# Altium PCB Voltage_2020.PcbDoc
Units mm, origin at the board's own origin, x right, y up, seen from the top; angles counter-clockwise.
Board outline 212.5 x 132.84 mm, 2 copper layers (Top Layer, Bottom Layer); 93 components, 69 nets, 360 pads, 5 vias.
Unrouted connection lines stored in the file: 1.
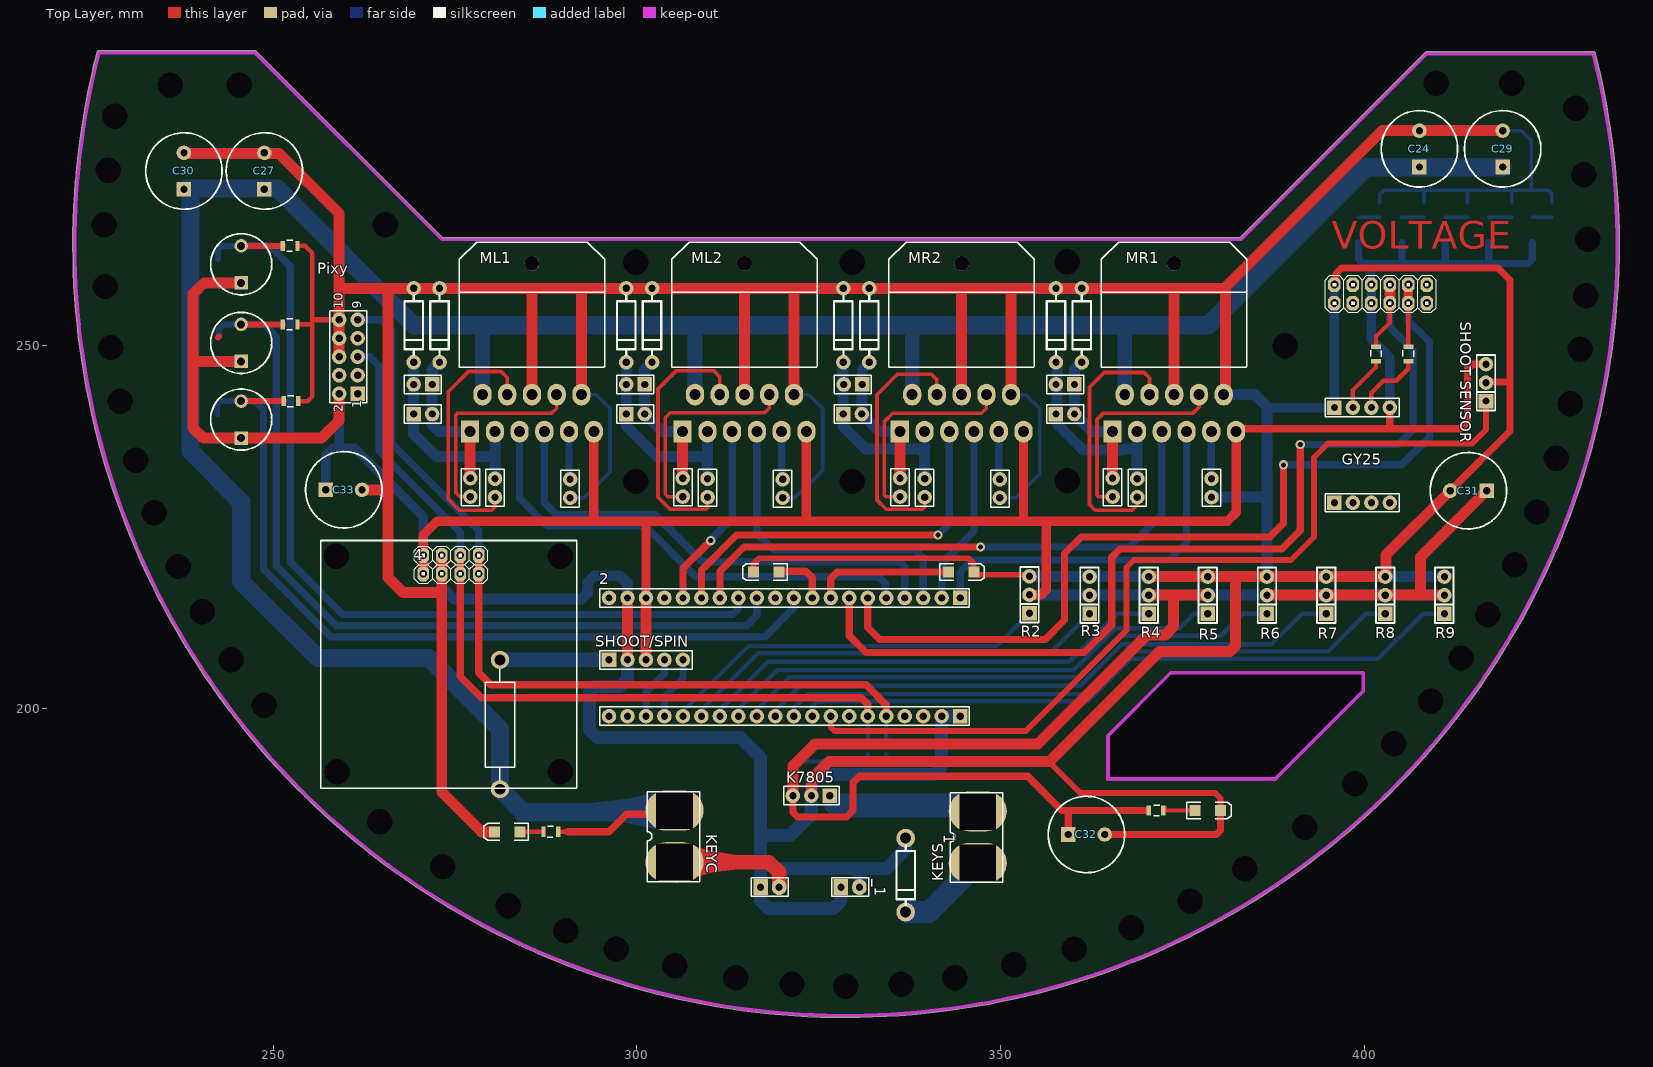
[diagram p0: Top Layer view]
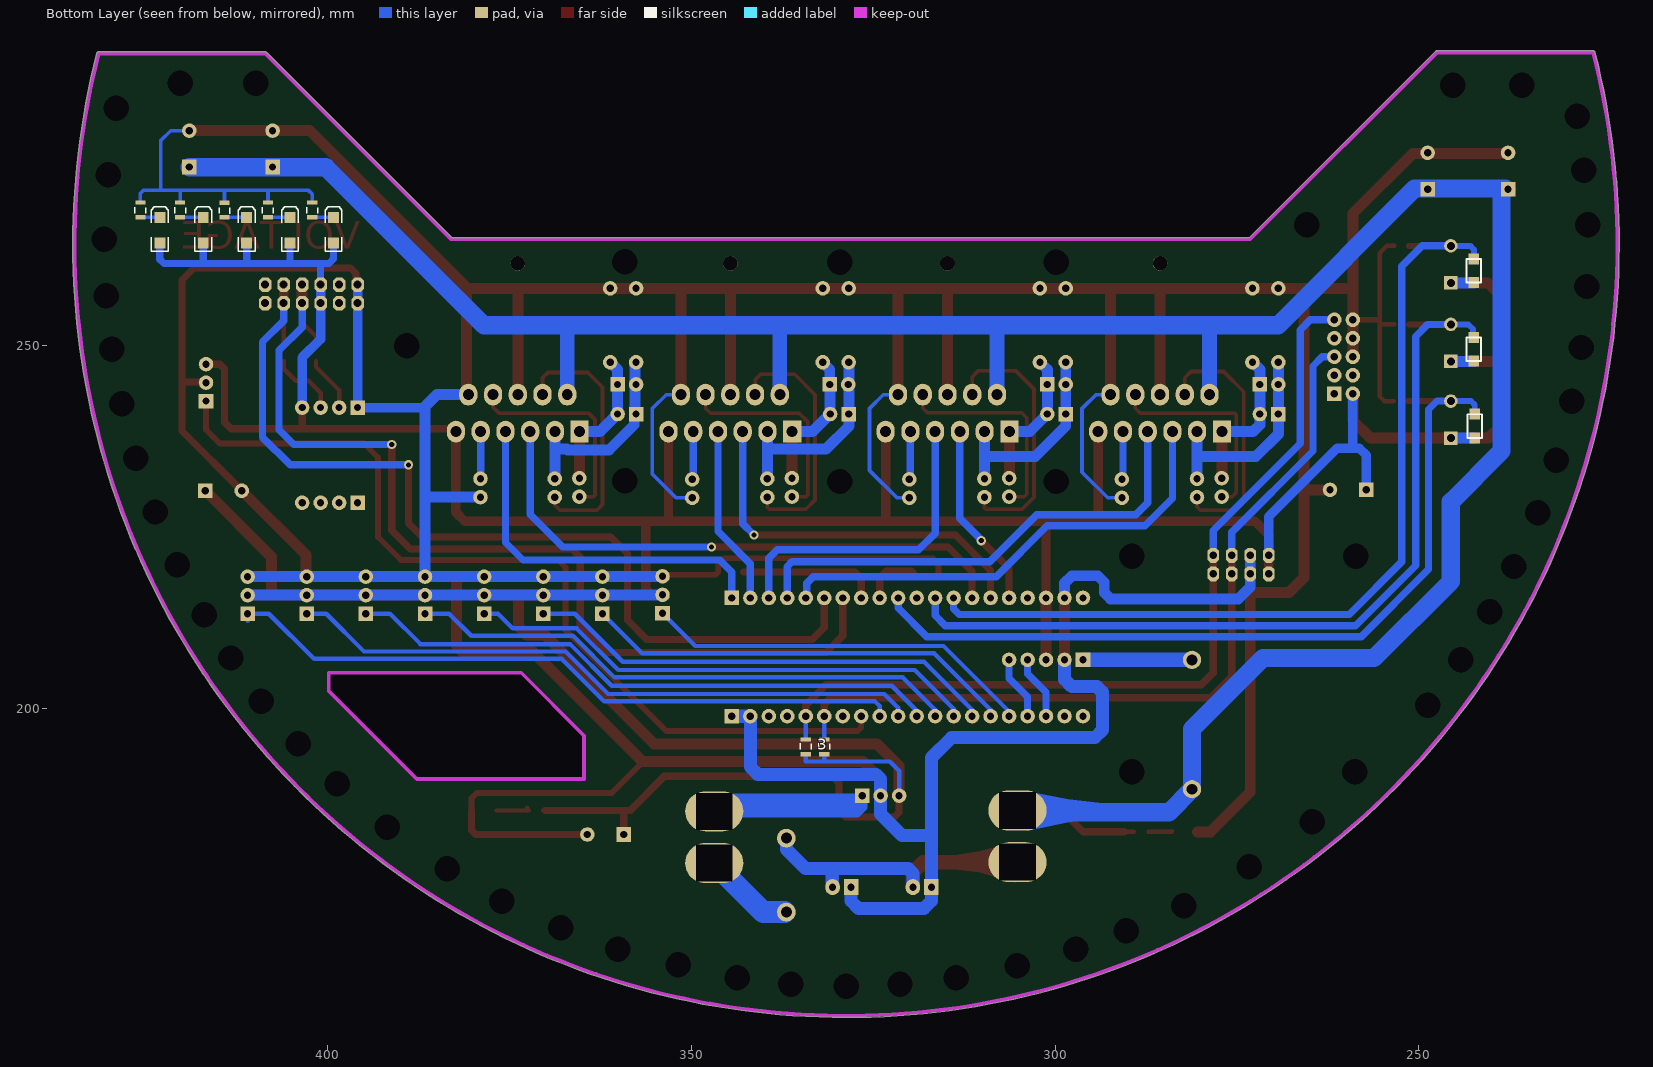
[diagram p1: Bottom Layer view, seen from below]

## Layer stack, top to bottom
Top Solder: solder mask 0.0102, Solder Resist, Dk 3.5
Top Layer: signal copper 0.0356
Dielectric1: dielectric 0.32, FR-4, Dk 4.8
Bottom Layer: signal copper 0.0356
Bottom Solder: solder mask 0.0102, Solder Resist, Dk 3.5

## Board outline
225.811,290.246 cw(c226.054,290.183) 225.835,290.305 cw(c226.06,290.195) 226.06,290.445 247.523,290.445 cw(c247.523,290.195) 247.7,290.372 cw(c247.523,290.195) 247.7,290.372 273.281,264.791 327.914,264.791 382.928,264.791 408.382,290.245 ccw(c408.559,290.068) 408.382,290.245 cw(c408.559,290.068) 408.559,290.318 431.389,290.318 cw(c431.44,290.073) 431.682,290.135 cw(c328.733,263.858) 434.983,263.858 cw(c328.733,263.858)
cut-out: 373.38,204.978 399.796,204.978 399.796,202.438 387.731,190.373 364.744,190.373 364.744,196.342

## Design rules (kind name [scope] priority, off if disabled: settings)
Clearance [All] p1: gap=0.254 ignorepadtopadclearanceinfootprint=FALSE except(0: Arc-Hole Track-Hole SMDPad-Hole THPad-Hole Via-Hole Fill-Hole Poly-Hole Region-Hole Text-Hole)
PolygonConnect [All] p1: connectstyle=Relief reliefconductorwidth=0.254 reliefentries=4 polygonreliefangle="90 Angle" airgapwidth=0.254
RoutingVias [All] p1: holewidth=0.711 width=1.27 viastyle="Through Hole" minholewidth=0.711 minwidth=1.27 maxholewidth=0.711 maxwidth=1.27
SolderMaskExpansion [All] p1: expansion=0.102
Width [All] p1: maxlimit=3 minlimit=0.254 preferedwidth=1
30 further rules are at their usual default settings.

## Components (designator, comment, footprint, x,y, rotation, side; value= is the part's Value field where it differs from the comment)
1 "" DIODE0.4#1 336.931,182.245 r270 top
2 "Comment" HDR1X20 344.424,215.265 r180 top
3 "Comment" MY_RES_SMD_0805 334.264,194.802 r270 bottom
4 "Comment" My_1X04 274.447,218.567 r180 top
_1 "Header 2" HDR1X2#1 328.041,175.514 r0 top
C24 "SHARP1" RB5-10.5 407.543,276.987 r270 top
C27 "SHARP1" RB5-10.5 248.793,273.939 r270 top
C29 "SHARP1" RB5-10.5 418.973,276.987 r270 top
C30 "SHARP1" RB5-10.5 237.744,273.939 r270 top
C31 "SHARP1" RB5-10.5 414.274,229.997 r0 top
C32 "SHARP1" RB5-10.5 361.783,182.753 r180 top
C33 "SHARP1" RB5-10.5 259.715,230.124 r180 top
GY25 "Comment" HDR1X4 395.859,241.427 r0 top
K7805 "Comment" HDR1X3 326.517,188.087 r180 top
KEYC "" "kk - duplicate1" 302.681,178.955 r90 top
KEYS "Component_1" "kk - duplicate1" 344.337,178.828 r90 top
ML1 "MOTOR4" "L6203 SL" 285.574,249.682 r180 top
ML2 "MOTOR4" "L6203 SL" 314.784,249.682 r180 top
MR1 "MOTOR4" "L6203 SL" 373.839,249.682 r180 top
MR2 "MOTOR4" "L6203 SL" 344.629,249.682 r180 top
Pixy "Comment" MY_HDR2X5 260.35,248.412 r90 top
R2 "" SIP3#1 353.949,213.147 r90 top
R3 "" SIP3#1 362.204,213.106 r90 top
R4 "" SIP3#1 370.332,213.106 r90 top
R5 "" SIP3#2 378.46,213.106 r90 top
R6 "" SIP3#1 386.588,213.106 r90 top
R7 "" SIP3#1 394.716,213.106 r90 top
R8 "" SIP3#1 402.844,213.106 r90 top
R9 "" SIP3#1 410.972,213.106 r90 top
"SHOOT SENSOR" "" SIP3#1 416.687,242.316 r90 top
SHOOT/SPIN "Comment" HDR1X5 296.164,206.756 r0 top
? "Comment" MY_RES_SMD_0805 425.704,268.605 r90 bottom
? "Comment" 3.2X1.6X1.1 423.037,265.811 r90 bottom
? "Comment" MY_RES_SMD_0805 420.243,268.605 r90 bottom
? "Comment" 3.2X1.6X1.1 417.068,265.811 r90 bottom
? "Comment" MY_RES_SMD_0805 414.147,268.561 r90 bottom
? "Comment" 3.2X1.6X1.1 411.099,265.811 r90 bottom
? "Comment" MY_RES_SMD_0805 408.178,268.605 r90 bottom
? "Comment" MY_RES_SMD_0805 402.082,268.605 r90 bottom
? "Comment" 3.2X1.6X1.1 405.13,265.811 r90 bottom
? "Comment" 3.2X1.6X1.1 399.161,265.811 r90 bottom
? "Comment" AXIAL-0.7 281.178,197.866 r90 top
? "Comment" MY_RES_SMD_0805 406.019,248.793 r270 top
? "Comment" MY_RES_SMD_0805 401.574,248.793 r270 top
? "Comment" HDR1X4 395.859,228.346 r0 top
? "Comment" MY_SPST_2 245.618,239.776 r90 top
? "Comment" MY_SPST_2 245.618,250.317 r90 top
? "Comment" MY_cap_smd10uf 242.443,260.223 r270 bottom
? "Comment" MY_cap_smd10uf 242.443,249.428 r270 bottom
? "Comment" MY_cap_smd10uf 242.316,238.887 r270 bottom
? "Comment" MY_RES_SMD_0805 252.476,242.316 r0 top
? "Comment" MY_RES_SMD_0805 252.349,252.857 r0 top
? "Comment" MY_RES_SMD_0805 252.349,263.652 r0 top
? "Comment" MY_SPST_2 245.618,261.112 r90 top
? "Comment" MY_RES_SMD_0805 331.724,194.802 r270 bottom
? "Comment" 3.2X1.6X1.1 344.551,218.821 r0 top
? "Comment" 3.2X1.6X1.1 317.754,218.821 r180 top
? "Comment" My_1X04 274.447,221.107 r180 top
? "Comment" My_2X06 402.209,257.048 r0 top
? "Comment" MY_RES_SMD_0805 288.163,183.122 r0 top
? "Comment" MY_RES_SMD_0805 371.348,186.055 r180 top
? "Comment" 3.2X1.6X1.1 282.174,183.122 r180 top
? "Comment" 3.2X1.6X1.1 378.46,186.055 r0 top
? "Comment" HDR1X20 344.424,199.009 r180 top
? "Cap" RAD-0.1 320.024,230.29 r270 top
? "Cap" RAD-0.1 309.704,230.378 r270 top
? "Cap" RAD-0.1 306.316,230.452 r270 top
? "Header 2" HDR1X2#2 298.528,240.538 r0 top
? "Header 2" HDR1X2#2 301.068,244.602 r180 top
? "" DIODE0.4#2 298.528,257.81 r270 top
? "" DIODE0.4#3 302.084,257.81 r270 top
? "Cap" RAD-0.1 290.814,230.29 r270 top
? "Cap" RAD-0.1 280.494,230.378 r270 top
? "Cap" RAD-0.1 277.106,230.452 r270 top
? "Header 2" HDR1X2#2 269.318,240.538 r0 top
? "Header 2" HDR1X2#2 271.858,244.602 r180 top
? "" DIODE0.4#2 269.318,257.81 r270 top
? "" DIODE0.4#3 272.874,257.81 r270 top
? "" DIODE0.4#3 331.929,257.81 r270 top
? "" DIODE0.4#2 328.373,257.81 r270 top
? "Header 2" HDR1X2#2 330.962,244.602 r180 top
? "Header 2" HDR1X2#2 328.373,240.538 r0 top
? "Cap" RAD-0.1 336.161,230.452 r270 top
? "Cap" RAD-0.1 339.549,230.378 r270 top
? "Cap" RAD-0.1 349.869,230.29 r270 top
? "" DIODE0.4#3 361.139,257.81 r270 top
? "" DIODE0.4#2 357.583,257.81 r270 top
? "Header 2" HDR1X2#2 360.123,244.602 r180 top
? "Header 2" HDR1X2#2 357.583,240.538 r0 top
? "Cap" RAD-0.1 365.371,230.452 r270 top
? "Cap" RAD-0.1 368.759,230.378 r270 top
? "Cap" RAD-0.1 378.968,230.378 r270 top
? "Header 2" HDR1X2#3 316.992,175.514 r0 top

## Footprints (in the part's own frame and the unit in brackets; to place one, negate y for a bottom-side part, rotate by r counter-clockwise, add the part's x,y. Pads: shape width x height; smd on the part's side, far side on the other; paste and mask are expansions set on the pad)
3.2X1.6X1.1 [mm] "SMT LED; 2 Flat Leads"
  rect 1.5x1.5 smd: 1(-1.75,0) 2(1.75,0)
  silkscreen extent -2.9,-1.15 3.2,1.15
AXIAL-0.7 [mm] "Axial Device, Thru-Hole; 2 Leads; 0.7 in Pin Spacing"
  round 2.5 hole 1.5: 1(-8.89,0) 2(8.89,0)
  silkscreen extent -7.62,-2.03 7.62,2.03
DIODE0.4#1 [mm]
  round 2.575 hole 1.5: 17(0,0) 18(10.16,0)
  silkscreen extent 1.02,-1.27 9.14,1.27
DIODE0.4#2 [mm]
  round 2 hole 1: 151(0,0) 152(10.16,0)
  silkscreen extent 1.02,-1.27 9.14,1.27
DIODE0.4#3 [mm]
  round 2 hole 1: 153(0,0) 154(10.16,0)
  silkscreen extent 1.02,-1.27 9.14,1.27
HDR1X2#1 [mm]
  rect 2x2.2 hole 1: 63(0,0)
  oval 2x2.2 hole 1: 64(2.54,0)
  silkscreen extent -1.27,-1.27 3.81,1.27
HDR1X2#2 [mm]
  rect 2x2 hole 1: 1(0,0)
  round 2 hole 1: 2(2.54,0)
  silkscreen extent -1.27,-1.27 3.81,1.27
HDR1X2#3 [mm]
  rect 2x2.2 hole 1: 1(0,0)
  oval 2x2.2 hole 1: 2(2.54,0)
  silkscreen extent -1.27,-1.27 3.81,1.27
HDR1X3 [mm] "Connector; Header; 3 Position"
  rect 2x2 hole 1: 1(0,0)
  round 2 hole 1: 2(2.54,0) 3(5.08,0)
  silkscreen extent -1.27,-1.27 6.35,1.27
HDR1X4 [mm] "Connector; Header; 4 Position"
  rect 2x2 hole 1 unplated: 1(0,0)
  round 2 hole 1 unplated: 2(2.54,0) 3(5.08,0) 4(7.62,0)
  silkscreen extent -1.27,-1.27 8.89,1.27
HDR1X5 [mm] "Connector; Header; 5 Position"
  rect 2x2 hole 1: 1(0,0)
  round 2 hole 1: 2(2.54,0) 3(5.08,0) 4(7.62,0) 5(10.16,0)
  silkscreen extent -1.27,-1.27 11.43,1.27
HDR1X20 [mm] "Connector; Header; 20 Position"
  rect 2x2 hole 1: 1(0,0)
  round 2 hole 1: 2(2.54,0) 3(5.08,0) 4(7.62,0) 5(10.16,0) 6(12.7,0) 7(15.24,0) 8(17.78,0) 9(20.32,0) 10(22.86,0) 11(25.4,0) 12(27.94,0) 13(30.48,0) 14(33.02,0) 15(35.56,0) 16(38.1,0) 17(40.64,0) 18(43.18,0) 19(45.72,0) 20(48.26,0)
  silkscreen extent -1.27,-1.27 49.53,1.27
"kk - duplicate1" [mm]
  oval 5.5x8 hole 5 square: 2(0,-2.5) 3(7.1,-2.5)
  silkscreen extent -2.67,-5.97 9.65,1.25
"L6203 SL" [mm]
  round 2 hole 2: 0(0,-11.557)
  rect 2.5x3 hole 1.5: 1(8.5,11.557)
  oval 2.5x3 hole 1.5: 2(6.8,6.477) 3(5.1,11.557) 4(3.4,6.477) 5(1.7,11.557) 6(0,6.477) 7(-1.7,11.557) 8(-3.4,6.477) 9(-5.1,11.557) 10(-6.8,6.477) 11(-8.5,11.557)
  silkscreen extent -10,-14.48 10,2.69
My_1X04 [mil]
  oct 60x80 hole 40: 1(-150,0) 2(-50,0) 3(50,0) 4(150,0)
  silkscreen extent -200,-50 200,50, body extent -198,-49 202,51, height 234
My_2X06 [mm]
  oct 1.7x2 hole 1.1: 1(-6.35,-1.27) 2(-6.35,1.27) 3(-3.81,-1.27) 4(-3.81,1.27) 5(-1.27,-1.27) 6(-1.27,1.27) 7(1.27,-1.27) 8(1.27,1.27) 9(3.81,-1.27) 10(3.81,1.27) 11(6.35,-1.27) 12(6.35,1.27)
  silkscreen extent -7.62,-2.54 7.62,2.54, body extent -7.62,-2.59 7.62,2.49, height 5.94
MY_cap_smd10uf [mm]
  rect 1.5x1.42 smd: +(-1.63,0) -(1.63,0)
  silkscreen extent -1.63,-1 1.62,1, body extent -1.63,-1 1.57,0.9, height 1.9
MY_HDR2X5 [mm]
  rect 2x2 hole 1: 1(-5.08,-1.27)
  round 2 hole 1: 2(-5.08,1.27) 3(-2.54,-1.27) 4(-2.54,1.27) 5(0,-1.27) 6(0,1.27) 7(2.54,-1.27) 8(2.54,1.27) 9(5.08,-1.27) 10(5.08,1.27)
  silkscreen extent -6.35,-2.54 6.35,2.54, body extent -10.16,-4.57 10.16,4.57, height 9.86
MY_RES_SMD_0805 [mm]
  rect 0.6x1.4 smd: 1(-1,0) 2(1,0)
  silkscreen extent -0.5,-0.75 0.35,0.75, body extent -1,-0.62 1,0.63, height 0.78
MY_SPST_2 [mm]
  rect 1.85x1.85 hole 1.1: 1(-2.54,0)
  round 1.85 hole 1.1: 2(2.54,0)
  silkscreen extent -4.19,-4.2 4.19,4.2, body extent -5,-3.08 5,2.92, height 5.4
RAD-0.1 [mm]
  round 2 hole 1: 1(-1.27,0) 2(1.27,0)
  silkscreen extent -2.54,-1.27 2.54,1.27
RB5-10.5 [mm]
  round 2 hole 1: 1(-2.5,0)
  rect 2x2 hole 1: 2(2.5,0)
  silkscreen extent -5.25,-5.25 5.25,5.25
SIP3#1 [mm]
  rect 2x2 hole 1: 1(0,0)
  round 2 hole 1: 2(2.54,0) 3(5.08,0)
  silkscreen extent -1.27,-1.27 6.35,1.27
SIP3#2 [mm]
  round 2 hole 1: 129(2.54,0) 130(5.08,0)
  rect 2x2 hole 1: 131(0,0)
  silkscreen extent -1.27,-1.27 6.35,1.27

## Free pads (board coordinates)
  round 1.524 hole 3.5: 3(226.822,266.573) 3(226.949,258.064) 3(227.33,274.066) 3(227.711,249.682) 3(228.219,281.432) 3(228.981,242.316) 3(231.14,234.188) 3(233.68,226.949) 3(235.839,285.75) 3(236.982,219.583) 3(240.284,213.36) 3(244.221,206.756) 3(245.364,285.75) 3(248.793,200.533) 3(258.699,220.98) 3(258.826,191.389) 3(264.668,184.531) 3(265.43,266.573) 3(273.304,178.308) 3(282.321,172.974) 3(289.433,191.389) 3(289.433,220.98) 3(290.195,169.545) 3(297.18,167.005) 3(299.847,231.267) 3(299.847,261.366) 3(305.181,164.719) 3(313.563,163.068) 3(321.31,162.179) 3(328.676,161.925) 3(329.565,231.267) 3(329.565,261.366) 3(336.296,162.179) 3(343.662,163.068) 3(351.79,164.846) 3(359.156,231.394) 3(359.156,261.493) 3(360.123,167.005) 3(367.919,169.926) 3(376.047,173.609) 3(383.54,178.054) 3(389.128,249.936) 3(391.795,183.769) 3(398.653,189.738) 3(403.987,195.199) 3(409.067,201.041) 3(409.829,286.004) 3(413.258,207.01) 3(416.941,212.979) 3(420.243,286.004) 3(420.624,219.837) 3(423.672,227.076) 3(426.339,234.442) 3(428.244,241.935) 3(429.006,282.575) 3(429.641,249.428) 3(430.149,273.431) 3(430.403,256.794) 3(430.657,264.541)

## Via types
v1: diameter 1.27, hole 0.711, Top Layer to Bottom Layer, 5 vias

## Nets (pads, with @x,y where several pads share a name; then routed paths per layer and width w, separated by ;. In a path a pad name is that pad's centre, name@x,y a point inside that pad or via, vN(x,y) a via of type N, cw(c..) or ccw(c..) an arc to the next point about the centre after c; other vN are vias at no path point)
BOOT1_L1: ?.2@277.106,229.182 ML1.8 | length 28.3
  Top Layer w0.5: ?.2@277.106,229.182 275.643,229.182 275.082,229.743 275.082,240.411 275.336,240.665 288.29,240.665 288.974,241.349 ML1.8@288.974,242.492
BOOT1_L2: ?.2@306.316,229.182 ML2.8 | length 29.7
  Top Layer w0.5: ?.2@306.316,229.182 304.239,229.182 303.911,229.51 303.911,240.03 304.578,240.697 317.532,240.697 318.184,241.349 ML2.8
BOOT1_R1: ?.2@365.371,229.182 MR1.8 | length 29.1
  Top Layer w0.5: ?.2@365.371,229.182 363.4,229.182 363.22,229.362 363.22,239.776 364.109,240.665 376.428,240.665 377.239,241.476 MR1.8
BOOT1_R2: ?.2@336.161,229.182 MR2.8 | length 29
  Top Layer w0.5: ?.2@336.161,229.182 334.19,229.182 334.01,229.362 334.01,239.514 335.153,240.657 347.337,240.657 348.029,241.349 MR2.8
BOOT2_L1: ?.2@280.494,229.108 ML1.4 | length 35.2
  Top Layer w0.5: ?.2@280.494,229.108 280.494,227.789 280.035,227.33 275.59,227.33 274.066,228.854 274.066,243.586 276.86,246.38 281.305,246.38 282.174,245.511 ML1.4
BOOT2_L2: ?.2@309.704,229.108 ML2.4 | length 37.1
  Top Layer w0.5: ?.2@309.704,229.108 309.704,227.662 309.499,227.457 304.546,227.457 302.903,229.1 302.903,243.975 305.435,246.507 310.515,246.507 311.384,245.638 ML2.4@311.384,244.495 ; ML2.4 ML2.4@311.384,244.495 ; ML2.4@311.989,243.89 ML2.4@311.384,244.495
BOOT2_R1: ?.2@368.759,229.108 MR1.4 | length 36
  Top Layer w0.5: ?.2@368.759,229.108 368.759,228.043 368.046,227.33 362.966,227.33 362.204,228.092 362.204,244.221 364.236,246.253 369.697,246.253 370.439,245.511 MR1.4
BOOT2_R2: ?.2@339.549,229.108 MR2.4 | length 34.8
  Top Layer w0.5: ?.2@339.549,229.108 339.549,227.711 339.5,227.711 339.246,227.457 334.264,227.457 332.994,228.727 332.994,243.205 335.788,245.999 340.487,245.999 341.229,245.257 MR2.4
BUTTON1: 2.13 ?.1@251.349,263.652 ?.2@245.618,263.652 ?.+@242.443,261.853 | length 125.4
  Top Layer w0.8: ?.2@245.618,263.652 ?.1@251.349,263.652
  Bottom Layer w0.8: ?.+@242.443,261.853 242.443,263.144 242.951,263.652 ?.2@245.618,263.652
  Bottom Layer w1: ?.2@245.618,263.652 249.555,263.652 252.349,260.858 252.349,220.218 259.588,212.979 313.182,212.979 313.944,213.741 2.13
BUTTON2: 2.12 ?.1@251.349,252.857 ?.2@245.618,252.857 ?.+@242.443,251.058 | length 119.7
  Top Layer w0.8: 242.443,251.058 242.57,251.185 ; ?.2@245.618,252.857 ?.1@251.349,252.857
  Bottom Layer w0.8: ?.+@242.57,251.185 242.57,252.222 243.205,252.857 ?.2@245.618,252.857
  Bottom Layer w1: ?.2@245.618,252.857 248.793,252.857 250.444,251.206 250.444,219.71 258.699,211.455 315.087,211.455 316.484,212.852 2.12
BUTTON3: 2.10 ?.1@251.476,242.316 ?.2@245.618,242.316 ?.+@242.316,240.517 | length 115.8
  Top Layer w0.8: ?.2@245.618,242.316 ?.1@251.476,242.316
  Bottom Layer w0.8: ?.+@242.316,240.517 242.316,241.808 242.824,242.316 ?.2@245.618,242.316
  Bottom Layer w1: ?.2@245.618,242.316 247.523,242.316 248.666,241.173 248.666,219.202 257.937,209.931 317.627,209.931 321.564,213.868 321.564,214.757 2.10@321.31,215.011
GND: 2.19 4.3 "SHOOT SENSOR.2" ?.1@316.992,175.514 ?.1@344.424,199.009 ?.1@395.859,255.778 ?.2@253.349,252.857 ?.2@253.349,263.652 ?.2@253.476,242.316 ?.2@280.424,183.122 ?.2@290.814,229.02 ?.2@316.004,218.821 ?.2@320.024,229.02 ?.2@341.884,199.009 ?.2@346.301,218.821 ?.2@349.869,229.02 ?.2@378.968,229.108 ?.2@380.21,186.055 ?.2@395.859,258.318 ?.2@402.082,269.605 ?.2@408.178,269.605 ?.2@414.147,269.561 ?.2@420.243,269.605 ?.2@425.704,269.605 ?.3@273.177,221.107 ?.151 ?.153 _1.63 C24.1 C27.1 C29.1 C30.1 C31.1 C32.1 C33.1 GY25.1 K7805.2 ML1.6 ML1.10 ML2.6 ML2.10 MR1.6 MR1.10 MR2.6 MR2.10 Pixy.6 Pixy.8 Pixy.10 R2.3 R3.3 R4.3 R5.130 R6.3 R7.3 R8.3 R9.3 SHOOT/SPIN.2 | length 1116.4
  Top Layer w0.6: ?.2@253.349,252.857 255.397,252.857 ; ?.2@253.349,263.652 254.381,263.652 255.397,262.636 255.397,252.857 ; ?.2@253.476,242.316 254.762,242.316 255.397,242.951 255.397,252.857
  Top Layer w0.8: 255.651,253.492 Pixy.10 ; ?.2@316.004,218.694 316.004,218.821 316.004,219.936 316.794,220.726 345.567,220.726 346.301,219.992 346.301,218.821 346.682,218.44 353.736,218.44 R2.3 ; 357.822,193.992 359.116,195.286 357.568,193.738 356.743,192.913 356.783,192.873 356.783,192.619 360.934,188.468 379.476,188.468 380.21,187.734 ?.2@380.21,186.055
  Top Layer w1: C32.1 379.624,182.753 380.21,183.339 ?.2@380.21,186.055 ; ?.2@395.859,258.318 396.077,258.536 396.077,259.855 396.826,260.604 418.338,260.604 419.989,258.953 419.989,244.943 ; C31.1 419.989,238.212 419.989,244.943 ; 416.687,244.856 416.774,244.943 419.989,244.943
  Top Layer w1.5: C30.1@237.744,276.352 250.825,276.352 259.08,268.097 259.08,257.81 ; Pixy.6 Pixy.8 Pixy.10 259.08,257.81 ; C33.1 265.811,230.124 ; ?.3@273.177,221.107 4.3 273.177,216.027 ; ?.2@280.424,183.122 278.65,183.122 273.177,188.595 273.177,216.027 ; ML1.6 285.574,257.761 ; ML1.10 292.374,257.536 292.1,257.81 ; SHOOT/SPIN.2 2.19 ; ML2.6 314.784,257.81 ; ML2.10 321.584,257.81 ; K7805.2 323.977,190.373 326.39,192.786 356.743,192.786 356.743,192.834 356.783,192.873 371.808,207.899 374.777,207.899 381.508,207.899 382.27,208.661 382.27,218.186 ; MR2.6 344.629,257.81 ; MR2.10 351.429,257.81 ; R4.3 R5.130 382.27,218.186 ; MR1.6 373.839,257.361 ; MR1.10 380.873,243.439 380.873,257.81 ; C31.1 402.919,221.142 402.919,218.261 R8.3 R7.3 R6.3 382.27,218.186 ; C29.1@418.973,279.527 402.44,279.527 380.873,257.96 380.873,257.81 ; 259.08,257.81 265.811,257.81 ; 265.811,230.124 265.811,257.81 ; 265.811,230.124 265.811,218.059 267.843,216.027 273.177,216.027 ; 265.811,257.81 269.318,257.81 272.874,257.81 292.1,257.81 ; 292.1,257.81 314.784,257.81 ; 314.784,257.81 321.584,257.81 ; 321.584,257.81 344.629,257.81 ; 344.629,257.81 351.429,257.81 ; 351.429,257.81 361.139,257.81 380.873,257.81
  Bottom Layer w0.5: ?.2@290.814,229.02 292.774,229.02 296.291,232.537 296.291,241.3 294.386,243.205 ML1.10 ; ?.2@320.024,229.02 321.73,229.02 325.501,232.791 325.501,241.3 323.596,243.205 ML2.10 ; ?.2@349.869,229.02 352.083,229.02 355.346,232.283 355.346,241.3 353.441,243.205 MR2.10 ; ?.2@402.082,269.605 402.082,270.764 402.59,271.272 408.178,271.272 ; ?.2@408.178,269.605 408.178,271.272 ; ?.2@414.147,269.561 414.147,271.272 ; C29.1 421.553,279.487 422.91,278.13 422.91,271.272 ; ?.2@420.243,269.605 420.243,271.272 ; ?.2@425.704,269.605 425.704,270.891 425.323,271.272 422.91,271.272 ; 408.178,271.272 414.147,271.272 ; 414.147,271.272 420.243,271.272 ; 420.243,271.272 422.91,271.272
  Bottom Layer w1.3: 386.588,241.554 386.715,241.427 GY25.1 395.859,255.778 ?.2@395.859,258.318
  Bottom Layer w1.5: ?.3@273.177,221.107 4.3 273.177,216.789 274.828,215.138 292.354,215.138 293.243,216.027 293.243,217.424 294.132,218.313 297.688,218.313 298.704,217.297 2.19 ; SHOOT/SPIN.2@298.608,206.66 SHOOT/SPIN.2 ; R2.3 353.99,218.186 R3.3 R4.3 R5.130 R6.3 ; ?.2@378.968,229.108 386.334,229.108 386.588,229.362 ; MR1.10 384.937,243.205 386.588,241.554 386.588,229.362 ; R9.3 R8.3 R7.3 R6.3 ; R6.3 386.588,229.362
  Bottom Layer w1.8: SHOOT/SPIN.2 298.704,204.089 297.688,203.073 294.259,203.073 293.497,202.311 293.497,197.104 294.513,196.088 314.198,196.088 316.992,193.294 316.992,182.753 ; _1.63 328.041,173.609 327.025,172.593 318.008,172.593 316.992,173.609 316.992,175.514 316.992,182.753 ; ?.1@344.424,199.009 341.884,199.009 341.884,192.024 340.868,191.008 324.612,191.008 323.977,190.373 K7805.2 323.977,185.547 321.056,182.626 317.119,182.626 316.992,182.753
GYRX: ?.2@406.019,247.793 GY25.3 | length 9.5
  Top Layer w0.6: GY25.3 400.939,243.459 402.59,245.11 404.368,245.11 406.019,246.761 ?.2@406.019,247.793
GYTX: ?.2@401.574,247.793 GY25.2 | length 7.7
  Top Layer w0.6: GY25.2 398.399,243.84 401.574,247.015 ?.2@401.574,247.793
LED1: ?.1@283.924,183.122 ?.1@287.163,183.122 | length 3.4
  Top Layer w0.6: ?.1@283.924,183.122 ?.1@284.039,183.122 ; ?.1@283.924,183.237 ?.1@284.039,183.122 ; ?.1@287.163,183.122 ?.1@284.039,183.122
LED2: ?.1@372.348,186.055 ?.1@376.71,186.055 | length 4.4
  Top Layer w0.6: ?.1@372.348,186.055 ?.1@376.71,186.055
LED3: 2.8 ?.1@342.801,218.821 | length 19.2
  Top Layer w1: 2.8 326.644,217.932 327.533,218.821 ?.1@342.801,218.821
LED4: 2.9 ?.1@319.504,218.821 | length 7.9
  Top Layer w1: ?.1@319.504,218.694 319.758,218.948 323.215,218.948 324.104,218.059 2.9
LED5: ?.19
m1: 2.4 ML1.7 | length 67.3
  Bottom Layer w1: ML1.7 287.274,228.346 288.925,226.695 302.514,226.695 308.991,220.218 336.169,220.218 336.804,219.583 2.4
m2: 2.3 ML2.7 | length 43.7
  Bottom Layer w1: ML2.7 316.484,224.155 318.77,221.869 338.201,221.869 339.344,220.726 2.3
m3: 2.2 MR2.7 | length 24.7
  Bottom Layer w1: 2.2 341.884,219.964 346.329,224.409 MR2.7
m4: 2.1 MR1.7 | length 51.6
  Bottom Layer w1: 2.1 344.424,218.821 346.075,220.472 373.126,220.472 375.539,222.885 MR1.7
ML1_1: ?.1@271.858,244.602 ?.1@277.106,231.722 ?.2@271.858,240.538 ?.154@272.874,247.65 ML1.1 | length 21
  Top Layer w1.5: ML1.1 277.074,231.754 ?.1@277.106,231.722
  Bottom Layer w1.5: ?.154@272.874,247.65 271.858,246.634 271.858,244.602 271.858,240.538 271.858,239.063 272.796,238.125 ML1.1
ML1_2: ?.1@269.318,240.538 ?.1@280.494,231.648 ?.2@269.318,244.602 ?.152@269.318,247.65 ML1.3 | length 28.8
  Bottom Layer w1.5: ?.152@269.318,247.65 269.318,244.602 269.318,240.538 269.318,237.793 272.415,234.696 280.474,234.696 ; ML1.3 280.474,234.696 ; ?.1@280.494,231.648 280.474,231.668 280.474,234.696
ML2_1: ?.1@301.068,244.602 ?.1@306.316,231.722 ?.2@301.068,240.538 ?.154@302.084,247.65 ML2.1 | length 20.2
  Top Layer w1.5: ML2.1 306.284,231.754 ?.1@306.316,231.722
  Bottom Layer w1.5: ?.154@302.084,247.65 301.068,246.634 301.068,244.602 301.068,240.538 303.481,238.125 ML2.1
ML2_2: ?.1@298.528,240.538 ?.1@309.704,231.648 ?.2@298.528,244.602 ?.152@298.528,247.65 ML2.3 | length 28.1
  Bottom Layer w1.5: ?.152@298.528,247.65 298.528,244.602 298.528,240.538 298.528,238.887 302.719,234.696 309.684,234.696 ; ML2.3 309.684,234.696 ; ?.1@309.704,231.648 309.684,231.668 309.684,234.696
MR1_1: ?.1@360.123,244.602 ?.1@365.371,231.722 ?.2@360.123,240.538 ?.154@361.139,247.65 MR1.1 | length 20.2
  Top Layer w1.5: MR1.1 365.339,231.754 ?.1@365.371,231.722
  Bottom Layer w1.5: ?.154@361.139,247.65 360.123,246.634 360.123,244.602 360.123,240.538 362.536,238.125 MR1.1
MR1_2: ?.1@357.583,240.538 ?.1@368.759,231.648 ?.2@357.583,244.602 ?.152@357.583,247.65 MR1.3 | length 27.5
  Bottom Layer w1.5: ?.152@357.583,247.65 357.759,247.474 357.759,244.602 357.759,240.538 357.833,240.464 357.833,239.067 361.279,235.621 367.005,235.621 367.096,235.712 368.739,235.712 ; MR1.3 368.739,235.712 ; ?.1@368.759,231.648 368.739,231.668 368.739,235.712
MR2_1: ?.1@330.962,244.602 ?.1@336.161,231.722 ?.2@330.913,240.538 ?.154@331.929,247.65 MR2.1 | length 20.2
  Top Layer w1.5: MR2.1 336.129,231.754 ?.1@336.161,231.722
  Bottom Layer w1.5: ?.154@331.929,247.65 330.962,246.683 330.962,244.602 330.913,244.553 330.913,240.538 333.326,238.125 MR2.1
MR2_2: ?.1@328.373,240.538 ?.1@339.549,231.648 ?.2@328.422,244.602 ?.152@328.373,247.65 MR2.3 | length 27.6
  Bottom Layer w1.5: ?.152@328.373,247.65 328.295,247.572 328.295,238.887 331.47,235.712 339.344,235.712 ; MR2.3 339.529,231.668 ?.1@339.549,231.648
pwm1: 2.5 ML1.5 | length 66.3
  Bottom Layer w1: ML1.5 283.874,228.952 287.655,225.171 301.117,225.171 308.102,218.186 333.248,218.186 334.137,217.297 334.137,215.392 2.5
pwm2: 2.16 ML2.5 | length 25.7
  Top Layer w1: 2.16 306.324,219.329 v1(310.134,223.139)
  Bottom Layer w1: v1(310.134,223.139) 310.134,223.266 313.084,226.216 ML2.5
pwm3: 2.15 MR2.5 | length 53.2
  Top Layer w1: 2.15 308.864,219.075 313.69,223.901 v1(341.376,223.901)
  Bottom Layer w1: v1(341.376,223.901) 342.929,225.454 MR2.5
pwm4: 2.14 MR1.5 | length 79
  Top Layer w1: 2.14 311.404,218.948 314.706,222.25 v1(347.218,222.25)
  Bottom Layer w1: v1(347.218,222.25) 367.665,222.25 372.139,226.724 MR1.5
RX: 2.6 ?.1@406.019,249.793 ?.9@406.019,255.778 ?.10@406.019,258.318 | length 131.7
  Top Layer w0.6: ?.1@406.019,249.793 ?.9@406.019,255.778
  Top Layer w1: 2.6 331.724,211.201 333.375,209.55 356.108,209.55 358.775,212.217 358.775,221.361 361.061,223.647 386.969,223.647 388.874,225.552 v1(388.874,233.553)
  Top Layer w1.3: ?.9@406.019,255.778 ?.10@406.019,258.318
  Bottom Layer w1: v1(388.874,233.553) 405.13,233.553 408.94,237.363 408.94,250.444 406.019,253.365 ?.9@406.019,255.778
S0: ?.16 R2.1 | length 53.9
  Bottom Layer w0.6: ?.16 306.324,199.644 315.341,208.661 349.463,208.661 R2.1
S1: ?.15 R3.1 | length 59.7
  Bottom Layer w0.6: ?.15 308.864,199.898 316.611,207.645 356.743,207.645 R3.1
S2: ?.14 R4.1 | length 65.3
  Bottom Layer w0.6: ?.14 311.404,199.898 318.008,206.502 359.41,206.502 366.014,213.106 R4.1
S3: ?.13 R5.131 | length 71
  Bottom Layer w0.6: ?.13 313.944,200.025 319.278,205.359 360.045,205.359 365.76,211.074 374.523,211.074 376.555,213.106 R5.131
S4: ?.12@316.484,199.009 R6.1 | length 76.5
  Bottom Layer w0.6: ?.12@316.484,199.009 316.484,199.898 320.929,204.343 360.553,204.343 366.268,210.058 380.238,210.058 383.286,213.106 R6.1
S5: ?.11@319.024,199.009 R7.1 | length 82
  Bottom Layer w0.6: ?.11@319.024,199.009 319.024,199.771 322.453,203.2 360.934,203.2 366.649,208.915 387.223,208.915 391.414,213.106 R7.1
S6: ?.10@321.564,199.009 R8.1 | length 87.8
  Bottom Layer w0.6: ?.10@321.564,199.009 321.564,200.152 323.469,202.057 361.442,202.057 367.284,207.899 394.97,207.899 400.177,213.106 R8.1
S7: ?.9@324.104,199.009 R9.1 | length 94.5
  Bottom Layer w0.6: ?.9@324.104,199.009 324.104,200.406 324.739,201.041 361.95,201.041 367.792,206.883 401.828,206.883 408.051,213.106 R9.1 R9.1@410.972,212.131
S8: "SHOOT SENSOR.1" ?.8@326.644,199.009 | length 124.3
  Top Layer w0.8: ?.8@326.644,199.009 326.644,197.485 327.152,196.977 353.441,196.977 367.284,210.82 367.284,219.456 368.3,220.472 389.89,220.472 393.065,223.647 393.065,234.569 394.97,236.474 414.782,236.474 416.687,238.379 416.687,242.316
SCL: 4.2 ?.1@331.724,195.802 ?.2@275.717,221.107 ?.6@331.724,199.009 Pixy.5 | length 113.2
  Top Layer w1: ?.2@275.717,221.107 4.2 275.717,204.47 278.638,201.549 330.835,201.549 331.724,200.66 ?.6@331.724,199.009
  Bottom Layer w0.6: ?.1@331.724,195.802 ?.6@331.724,199.009
  Bottom Layer w1: Pixy.5 263.271,248.412 264.541,247.142 264.541,235.458 275.717,224.282 ?.2@275.717,221.107
SDA: 3.1 4.1 ?.1@278.257,221.107 ?.5@334.264,199.009 Pixy.9 | length 119.9
  Top Layer w1: ?.1@278.257,221.107 4.1 278.257,204.978 279.908,203.327 331.47,203.327 334.264,200.533 ?.5@334.264,199.009
  Bottom Layer w0.6: 3.1 ?.5@334.264,199.009
  Bottom Layer w1: Pixy.9 264.922,253.492 266.319,252.095 266.319,236.474 278.257,224.536 ?.1@278.257,221.107
SELF: 
shoot: ?.17 SHOOT/SPIN.5 | length 8.8
  Bottom Layer w1: ?.17 303.784,201.676 306.324,204.216 SHOOT/SPIN.5
spin: ?.18 SHOOT/SPIN.4 | length 8.8
  Bottom Layer w1: ?.18 301.244,202.311 303.784,204.851 SHOOT/SPIN.4
TX: 2.7 ?.1@401.574,249.793 ?.7@403.479,255.778 ?.8@403.479,258.318 | length 136.7
  Top Layer w0.6: ?.1@401.574,249.793 401.574,251.206 403.479,253.111 ?.7@403.479,255.778
  Top Layer w1: 2.7 329.184,210.058 331.47,207.772 361.442,207.772 365.252,211.582 365.252,220.853 366.395,221.996 388.62,221.996 391.16,224.536 v1(391.16,236.347)
  Top Layer w1.5: ?.7@403.479,255.778 ?.8@403.479,258.318
  Bottom Layer w1: v1(391.16,236.347) 404.622,236.347 406.654,238.379 406.654,249.301 403.479,252.476 ?.7@403.479,255.778
V1: ?.1@290.814,231.56 ML1.9 | length 6.6
  Bottom Layer w1: ?.1@290.674,231.7 ML1.9
  Bottom Layer w1.5: ?.1@290.674,231.7 ?.1@290.814,231.56
V2: ?.1@320.024,231.56 ML2.9 | length 6.6
  Bottom Layer w1: ML2.9 319.884,231.7 ?.1@320.024,231.56
V3: ?.1@349.869,231.56 MR2.9 | length 6.6
  Bottom Layer w1: MR2.9 349.729,231.7 ?.1@349.869,231.56
V4: ?.1@378.968,231.648 MR1.9 | length 6.4
  Bottom Layer w1: ?.1@378.939,231.677 MR1.9
VCC: 2.18 3.2 4.4 "SHOOT SENSOR.3" ?.1@245.618,237.236 ?.1@245.618,247.777 ?.1@245.618,258.572 ?.1@399.161,264.061 ?.1@405.13,264.061 ?.1@411.099,264.061 ?.1@417.068,264.061 ?.1@423.037,264.061 ?.2@331.724,193.802 ?.2@370.348,186.055 ?.4@270.637,221.107 ?.5@400.939,255.778 ?.6@400.939,258.318 ?.- C31.2 C32.2 C33.2 GY25.4 K7805.3 ML1.11 ML2.11 MR1.11 MR2.11 Pixy.2 R2.2 R3.2 R4.2 R5.129 R6.2 R7.2 R8.2 R9.2 SHOOT/SPIN.3 | length 660
  Top Layer w0.6: ?.2@370.078,186.055 ?.2@370.348,186.055
  Top Layer w1: K7805.3 321.437,185.801 322.072,185.166 328.803,185.166 329.692,186.055 329.692,189.865 330.581,190.754 353.695,190.754 358.394,186.055 359.283,186.055 ; C32.2 359.283,186.055 ; ?.2@370.078,186.055 359.283,186.055 ; MR1.11 382.72,238.506 403.479,238.506 ; GY25.4 403.479,238.506 ; 416.687,247.396 414.782,247.396 414.147,246.761 414.147,239.395 413.258,238.506 403.479,238.506
  Top Layer w1.3: 4.4@270.637,218.44 4.4 270.637,221.107 270.637,223.901 272.542,225.806 294.074,225.806 ; ML1.11 294.074,225.806 ; 2.18 301.244,225.679 301.371,225.806 ; ML2.11 323.284,226.002 323.088,225.806 ; MR2.11 353.129,225.864 353.187,225.806 ; R2.2 355.514,215.687 356.235,216.408 356.235,225.806 ; MR1.11 382.339,227.018 381.127,225.806 356.235,225.806 ; 294.074,225.806 301.371,225.806 ; 301.371,225.806 323.088,225.806 ; 323.088,225.806 353.187,225.806 ; 353.187,225.806 356.235,225.806
  Top Layer w1.5: ?.1@245.618,247.777 239.014,247.777 ; ?.1@245.618,258.572 240.538,258.572 239.014,257.048 239.014,247.777 ; Pixy.2 259.08,239.649 256.667,237.236 245.618,237.236 240.411,237.236 239.014,238.633 239.014,247.777 ; SHOOT/SPIN.3 2.18 ; K7805.3 321.437,192.151 324.485,195.199 355.092,195.199 370.078,210.185 372.618,210.185 373.761,211.328 373.761,215.646 ; R4.2 373.761,215.646 ; R5.129 373.761,215.646 ; R6.2 R7.2 R8.2 R9.2 ; 407.67,215.837 407.67,220.893 C31.2
  Bottom Layer w0.6: K7805.3 321.437,191.516 322.707,192.786 331.724,192.786 ; ?.2@331.724,193.802 331.724,192.786 ; 3.2 334.264,192.786 331.724,192.786
  Bottom Layer w1: ?.1@399.161,264.061 399.161,261.874 399.796,261.239 400.939,261.239 ; ?.6@400.939,258.318 400.939,261.239 ; ?.1@405.13,264.061 405.13,261.239 ; ?.1@411.099,264.061 411.099,261.366 411.226,261.239 ; ?.1@417.068,264.061 417.068,261.239 ; ?.1@423.037,264.061 423.037,261.825 422.451,261.239 417.068,261.239 ; 400.939,261.239 405.13,261.239 ; 405.13,261.239 411.226,261.239 ; 411.226,261.239 417.068,261.239
  Bottom Layer w1.3: C33.2 257.215,234.863 258.191,235.839 259.08,235.839 ; Pixy.2 259.08,235.839 ; ?.4@270.637,221.107 270.637,226.441 261.239,235.839 259.08,235.839 ; ?.6@400.939,258.318 400.939,255.778 400.939,250.825 403.479,248.285 GY25.4
  Bottom Layer w1.5: ?.-@242.316,237.257 242.337,237.236 ?.1@245.618,237.236 ; ?.-@242.443,258.593 242.464,258.572 ?.1@245.618,258.572 ; ?.-@242.464,247.777 ?.1@245.618,247.777 ; R2.2 R9.2@410.931,215.687
Vin: 1.17 ?.2@319.532,175.514 _1.64 KEYC.2 | length 42.1
  Top Layer w2: KEYC.2@304.927,179.07 305.054,178.943 318.135,178.943 319.532,177.546 ?.2@319.532,175.514
  Bottom Layer w1.8: ?.2@319.532,175.514 319.532,177.419 320.167,178.054 330.835,178.054 ; _1.64 330.619,175.552 330.619,177.838 330.835,178.054 ; 1.17 336.931,180.721 334.264,178.054 330.835,178.054
VLED1: ?.1@402.082,267.605 ?.2@399.161,267.561 | length 2.9
  Bottom Layer w0.5: ?.2@399.161,267.561 399.205,267.605 ?.1@402.082,267.605
VLED2: ?.1@408.178,267.605 ?.2@405.13,267.561 | length 3.1
  Bottom Layer w0.5: ?.2@405.13,267.561 405.174,267.605 ?.1@408.178,267.605
VLED3: ?.1@414.147,267.561 ?.2@411.099,267.561 | length 3
  Bottom Layer w0.5: ?.2@411.099,267.561 ?.1@414.147,267.561
VLED4: ?.1@420.243,267.605 ?.2@417.068,267.561 | length 3.2
  Bottom Layer w0.5: ?.2@417.068,267.561 417.112,267.605 ?.1@420.243,267.605
VLED5: ?.1@425.704,267.605 ?.2@423.037,267.561 | length 2.7
  Bottom Layer w0.5: ?.2@423.037,267.561 423.081,267.605 ?.1@425.704,267.605
VLED6: 
VLED7: 
VLED8: 
VS: ?.1@281.178,188.976 ?.2@289.163,183.122 C24.2 C27.2 C29.2 C30.2 KEYC.3 ML1.2 ML2.2 MR1.2 MR2.2 | length 388.3
  Top Layer w0.6: ?.2@289.163,183.122 290.449,183.122
  Top Layer w1: 290.449,183.122 296.152,183.122 298.565,185.535 305.042,185.535 KEYC.3@305.689,186.182
  Bottom Layer w2: C30.2 C30.2@238.633,270.55 ; ML1.2 278.774,252.73 ; ML2.2 307.984,252.73 ; MR2.2 337.829,252.73 ; MR1.2 367.039,252.73
  Bottom Layer w2.5: C30.2@238.125,271.526 250.571,271.526 269.367,252.73 278.774,252.73 307.984,252.73 337.829,252.73 367.039,252.73 378.46,252.73 400.177,274.447 C29.2@418.973,274.447 ; C30.2@238.633,270.55 238.633,235.458 245.618,228.473 245.618,217.551 256.159,207.01 271.399,207.01 281.178,197.231 281.178,188.976 284.353,185.801 304.927,185.801 KEYC.3
Vs1: 1.18 KEYS.2 | length 12.4
  Bottom Layer w3: 1.18@337.185,172.085 340.094,172.085 KEYS.2
VS_SHOOT: ?.2@281.178,206.756 SHOOT/SPIN.1 | length 15
  Bottom Layer w2: ?.2@281.178,206.756 SHOOT/SPIN.1
vss: K7805.1 KEYS.3 | length 22.2
  Bottom Layer w1.5: K7805.1 326.517,186.563 327.274,185.806 KEYS.3@346.837,185.806
pads on no net: 2.11 2.17 2.20 ?.1@395.859,228.346 ?.2@398.399,228.346 ?.3@339.344,199.009 ?.3@398.399,255.778 ?.3@400.939,228.346 ?.4@336.804,199.009 ?.4@398.399,258.318 ?.4@403.479,228.346 ?.7@329.184,199.009 ?.11@408.559,255.778 ?.12@408.559,258.318 ?.20 ML1.0 ML2.0 MR1.0 MR2.0 Pixy.1 Pixy.3 Pixy.4 Pixy.7

## Keep-outs
Keep-Out Layer:
  lines w0.5: 226.054,290.183 ccw(c328.733,263.858) 431.44,290.073 ; 226.06,290.195 247.523,290.195 273.177,264.541 327.914,264.541 383.032,264.541 408.559,290.068 431.419,290.068 ; 364.744,190.373 387.731,190.373 399.796,202.438 399.796,203.517 399.796,204.978 398.78,204.978 373.38,204.978 364.744,196.342 364.744,190.373

## Other copper
Top Layer:
  region net Vin: 305.371,181.737 310.452,180.467 313.373,179.959 313.373,177.927 310.452,177.546 305.371,176.149
  region: 300.863,181.356
  region: 300.99,181.102
  region: 306.832,176.53
  region: 301.498,181.102
  region: 303.53,191.897
  text "VOLTAGE" at 395.478,262.001 h6.5
Bottom Layer:
  region net vss: 346.583,185.619 346.583,188.341 344.297,188.341 325.628,188.341 327.274,185.806
  region: 344.678,179.197
  region: 346.075,180.594
  region net VS: 303.911,188.722 298.196,187.579 293.37,187.071 293.37,185.039 298.196,184.404 303.784,183.261

## Silkscreen, mask and mechanical layers (free items; w line width, h text height)
Top Overlay:
  lines w0.254: 256.54,189.103 291.719,189.103 291.719,223.139 256.54,223.139 256.54,189.103

## Text inside footprints (layer, text, board x,y; h text height)
Pixy: Top Overlay "2" at 259.588,240.792 h1.27 r90; Top Overlay "1" at 262.128,241.3 h1.27 r90; Top Overlay "9" at 262.128,255.016 h1.27 r90; Top Overlay "10" at 259.588,255.016 h1.27 r90